# Altium PCB S7CAS-PLEIADES-CARTE-MERE_P01.PcbDoc (part 1 of 3)
Units mil, origin at the board's own origin, x right, y up, seen from the top; angles counter-clockwise.
Board outline 5000 x 5000 mil, 4 copper layers (Top, Ground Plane, Power Plane, Bottom), stack 67.086 mil thick; 430 components, 327 nets, 2174 pads, 171 vias.
Unrouted connection lines stored in the file: 1387.
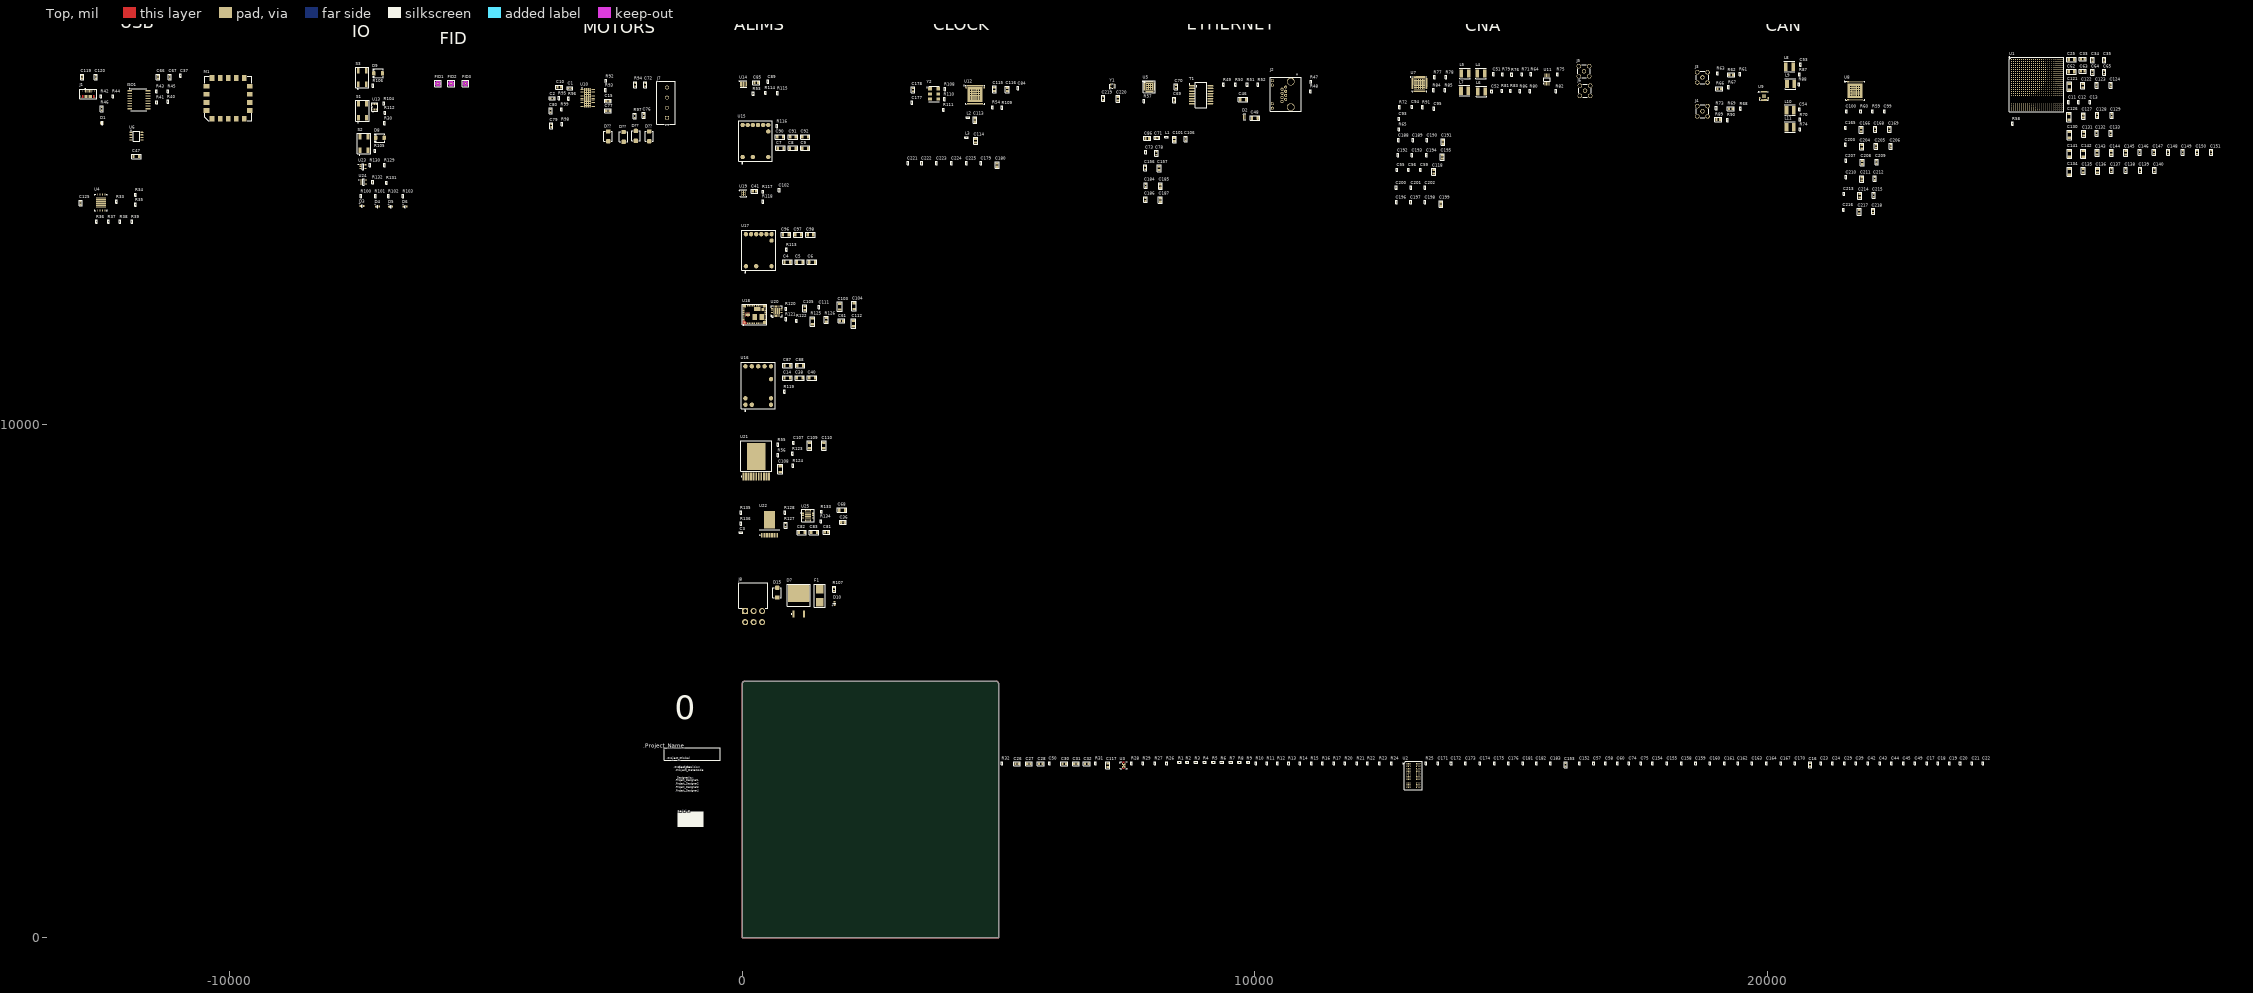
[diagram p0: Top view]
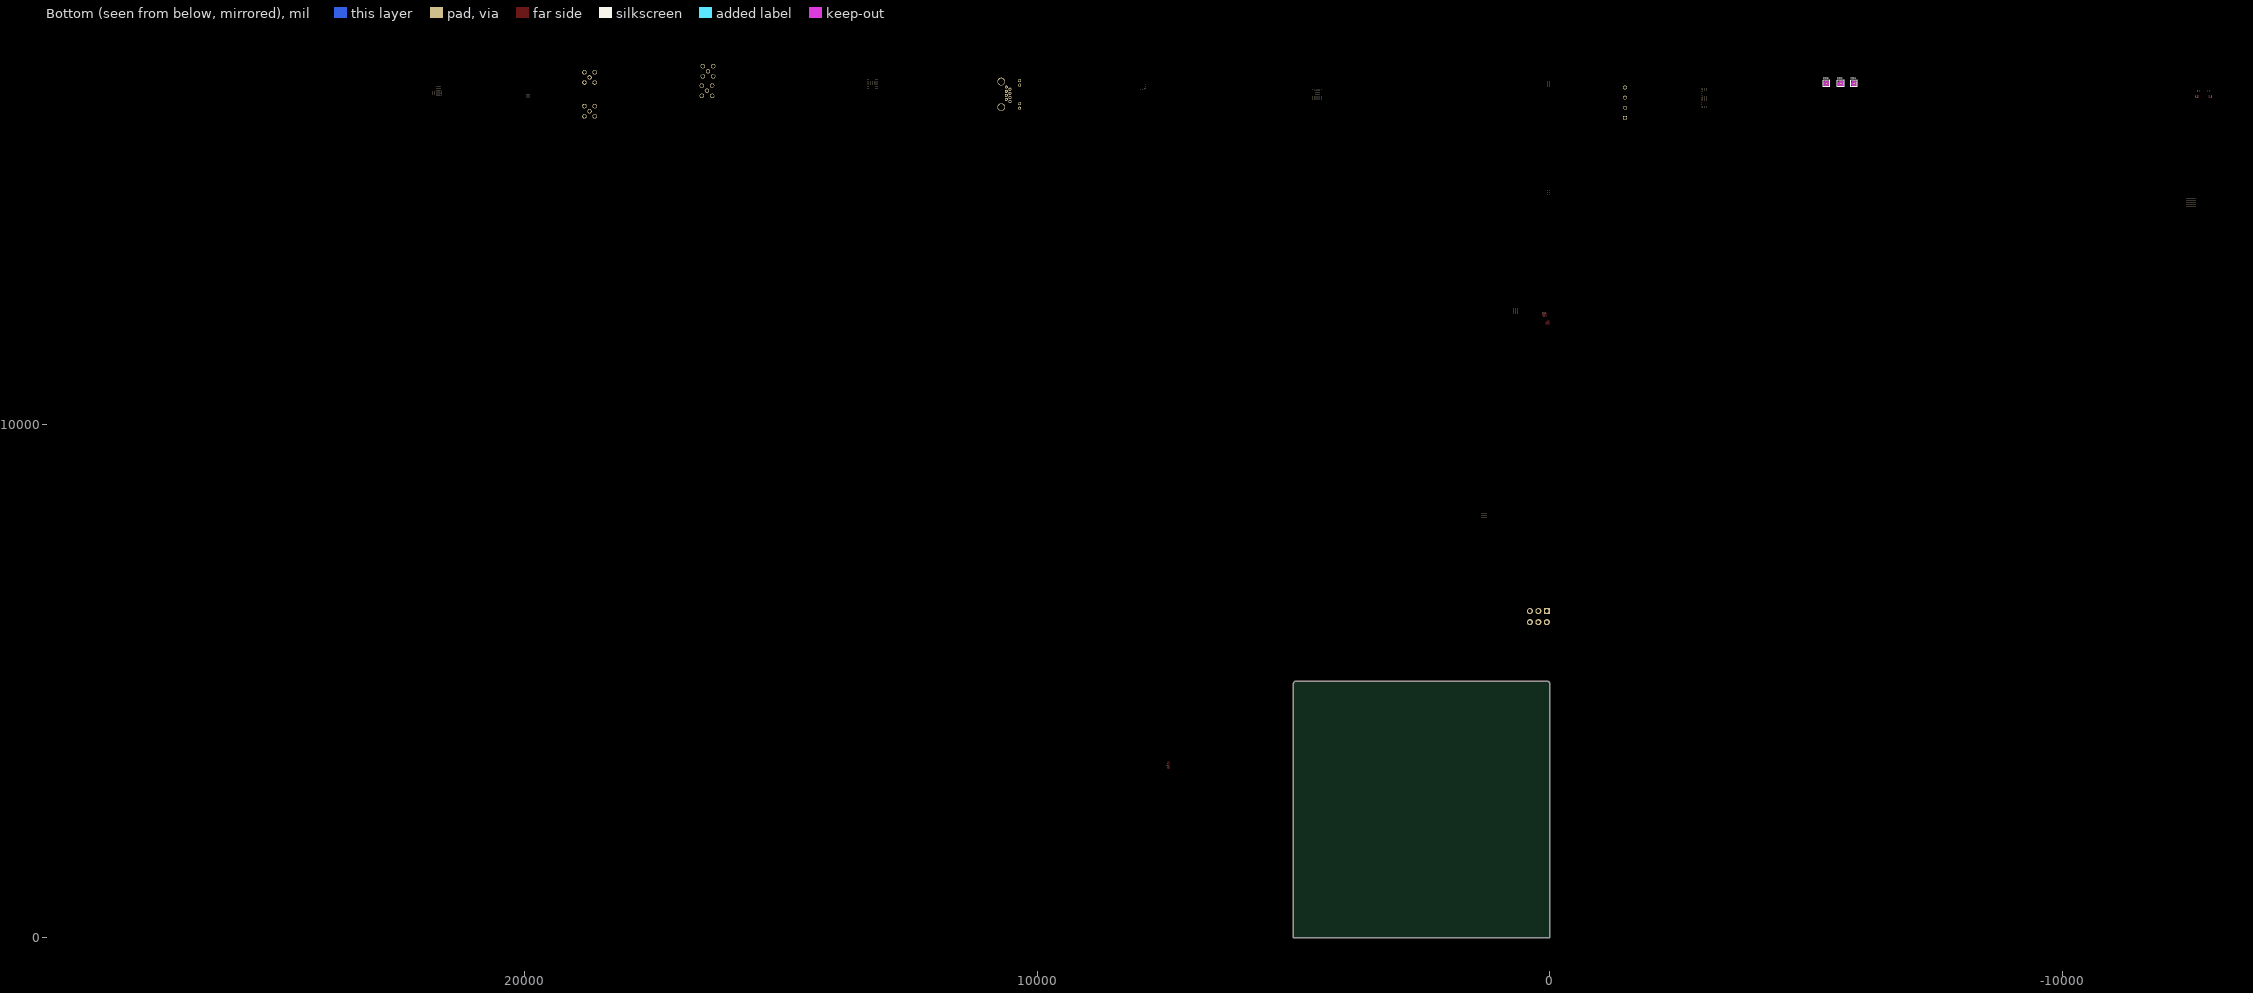
[diagram p1: Bottom view, seen from below]
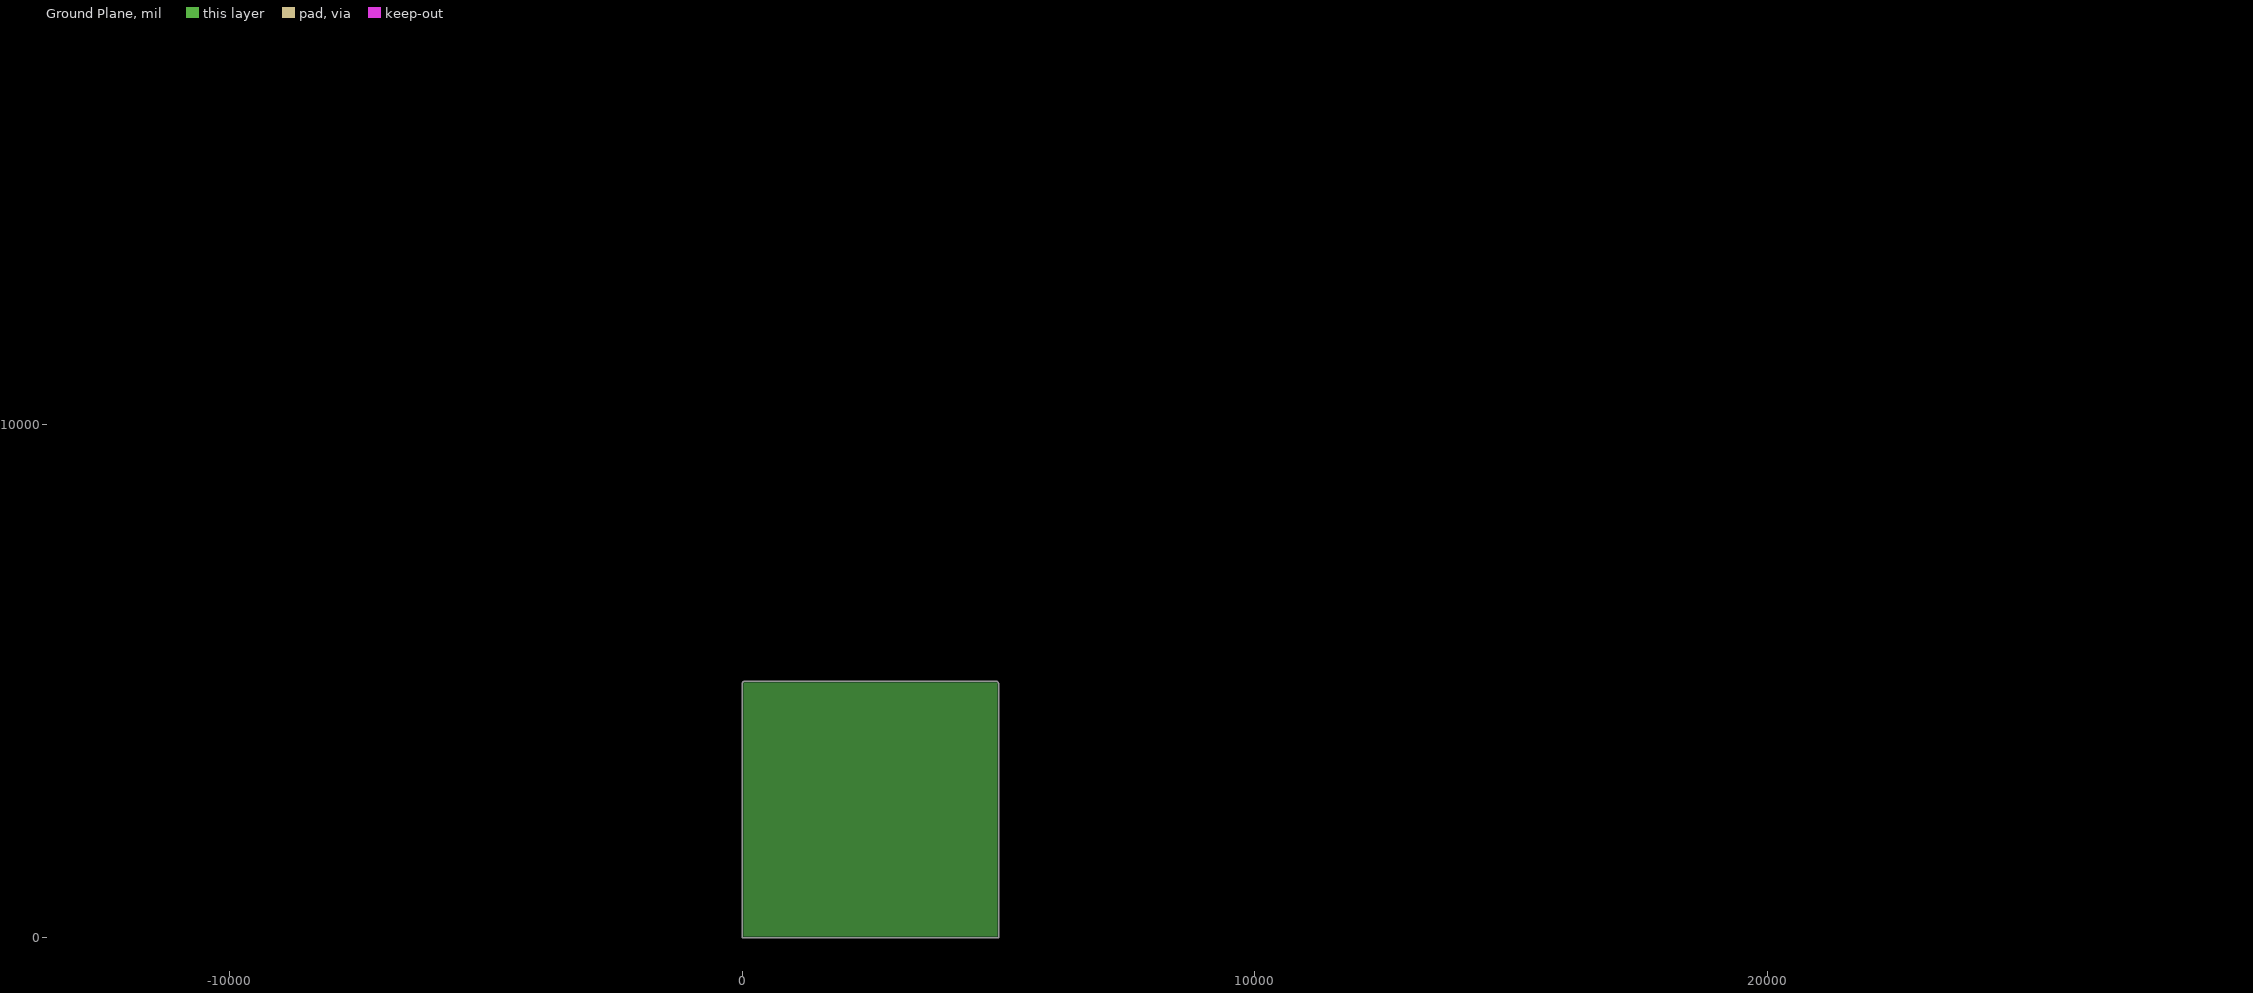
[diagram p2: Ground Plane, clearances drawn from the general rule]
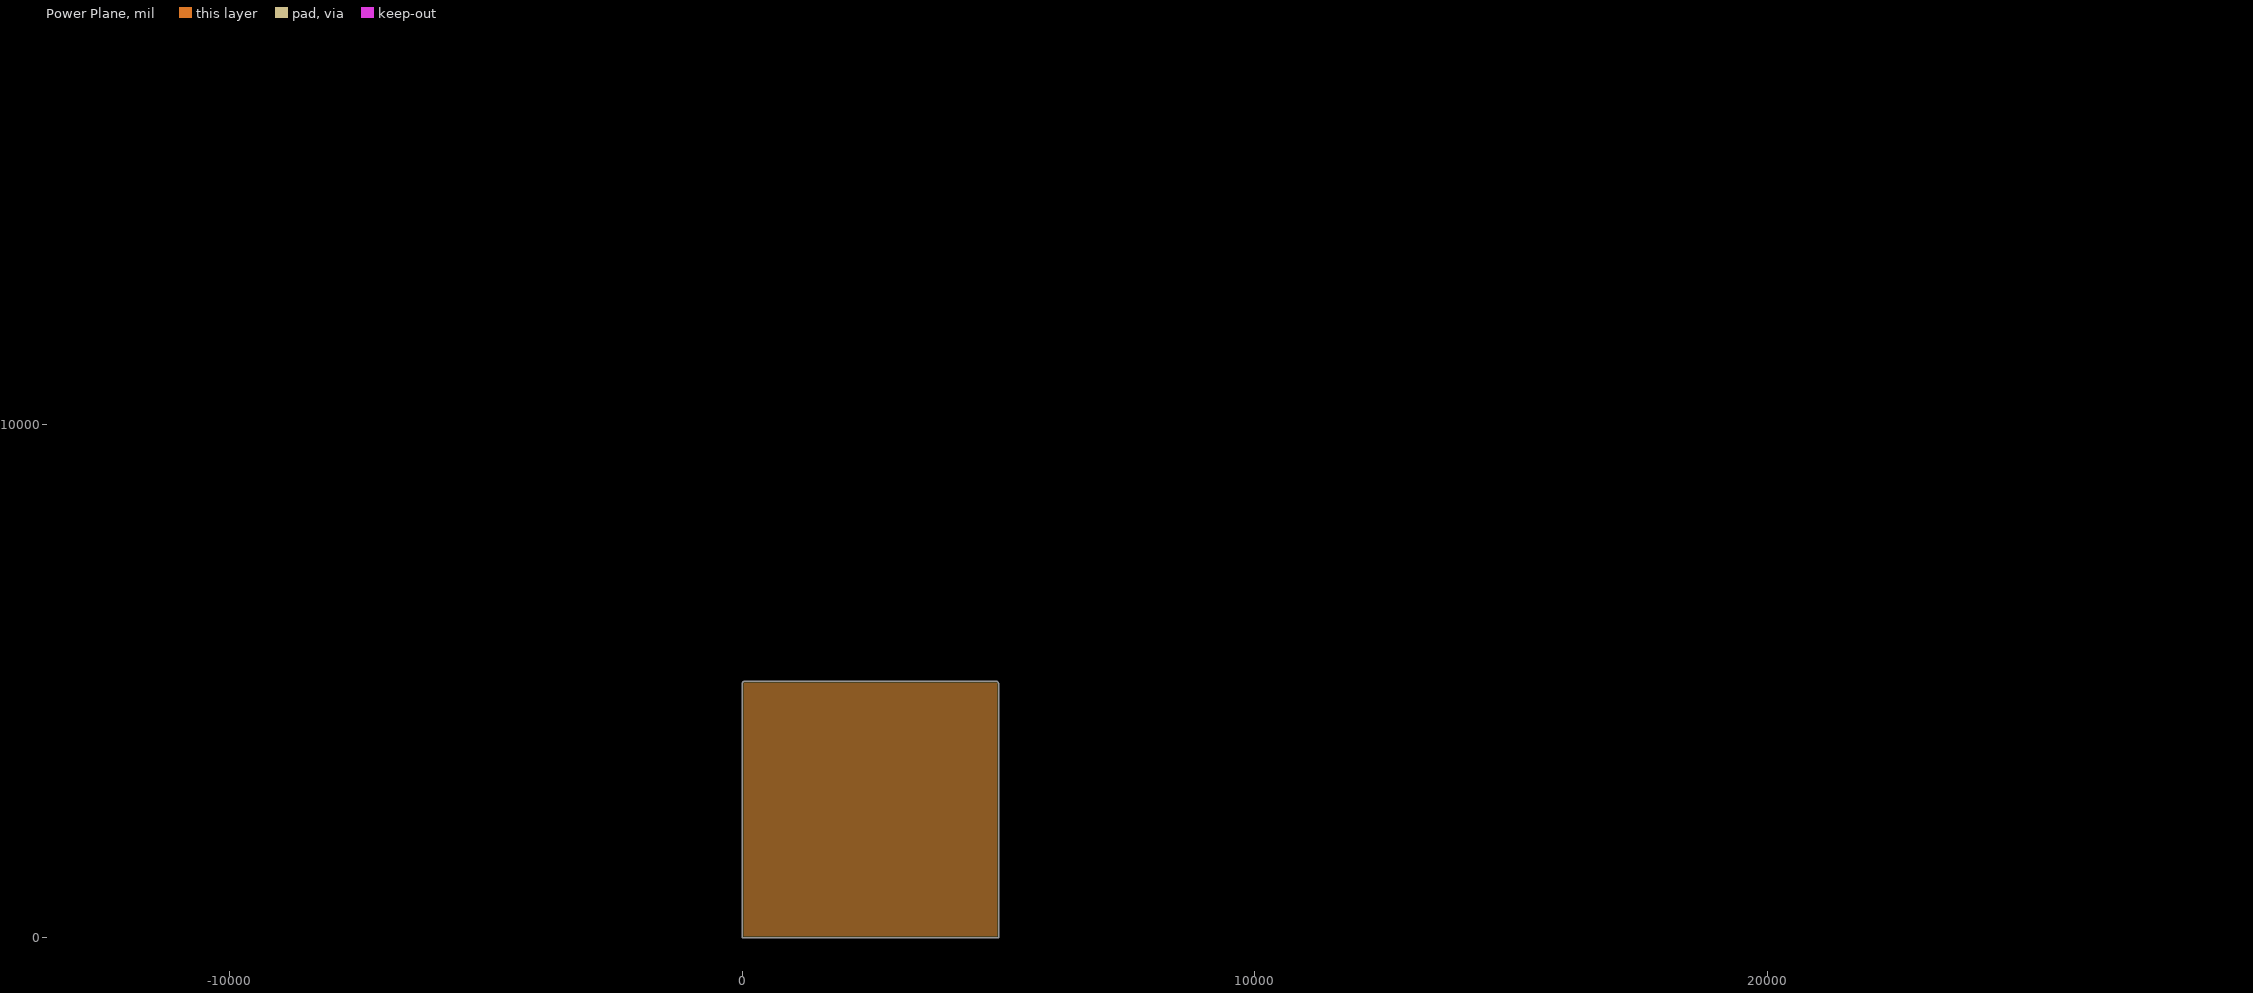
[diagram p3: Power Plane, clearances drawn from the general rule]

## Layer stack, top to bottom
Top Solder: solder mask 0.4, Solder Resist, Dk 3.5
Top: signal copper 1.378
Dielectric 1: prepreg 7.874, FR-4, Dk 4.2
Ground Plane: plane copper 0.669
Dielectric 3: core 47.244, Dk 4.2
Power Plane: plane copper 0.669
Dielectric 4: prepreg 7.874, Dk 4.2
Bottom: signal copper 1.378
Bottom Solder: solder mask 0.4, Solder Resist, Dk 3.5

## Board outline
0,0 5000,0 5000,4950 ccw(c4950,4950) 4950,5000 50,5000 ccw(c50,4950) 0,4950

## Design rules (kind name [scope] priority, off if disabled: settings)
Clearance [All] p1: gap=6 ignorepadtopadclearanceinfootprint=FALSE except(0: Arc-Hole Track-Hole SMDPad-Hole THPad-Hole Via-Hole Fill-Hole Poly-Hole Region-Hole Text-Hole)
ComponentClearance [All] p1: gap=4 collisioncheckmode=3 verticalgap=4 showdistances=FALSE
DiffPairsRouting [InDifferentialPairClass('All Differential Pairs')] p1: maxlimit=5 minlimit=5 mostfreqgap=5 toplayer_minwidth=45.03 toplayer_maxwidth=45.03 toplayer_prefwidth=12.87 bottomlayer_minwidth=45.03 bottomlayer_maxwidth=45.03 bottomlayer_prefwidth=12.87 impedanceprofiledriven=TRUE impedanceprofileid={94CB91C9-4EF6-439D-B189-707E4422B6E0} impedanceprofilevalue=80.000000 maxuncoupledlength=500
HoleSize [All] p1: absolutevalues=TRUE maxlimit=1000 minlimit=4 maxpercent=80.000 minpercent=20.000
HoleToHoleClearance [All] p1: gap=10 allowstackedmicrovias=FALSE
MinimumSolderMaskSliver [All] p1: minsoldermaskwidth=4
PlaneClearance [All] p1: clearance=6
PlaneConnect [All] p1: pad.planeconnectstyle=Relief pad.reliefexpansion=20 pad.reliefentries=4 pad.reliefconductorwidth=10 pad.reliefairgap=10 via.planeconnectstyle=Direct via.reliefexpansion=20 via.reliefentries=4 via.reliefconductorwidth=10 via.reliefairgap=10
PolygonConnect [All] p1: thpad.connectstyle=Relief thpad.reliefconductorwidth=10 thpad.reliefentries=4 thpad.polygonreliefangle="90 Angle" thpad.airgapwidth=10 smdpad.connectstyle=Direct smdpad.reliefconductorwidth=10 smdpad.reliefentries=4 smdpad.polygonreliefangle="90 Angle" smdpad.airgapwidth=10 via.connectstyle=Direct via.reliefconductorwidth=10 via.reliefentries=4 via.polygonreliefangle="90 Angle" via.airgapwidth=10
RoutingVias [All] p1: holewidth=10 width=20 viastyle="Through Hole" minholewidth=10 minwidth=20 maxholewidth=10 maxwidth=20
SilkToSilkClearance [All] p1: silktosilkclearance=4
SilkToSolderMaskClearance [IsPad] p1: minsilkscreentomaskgap=2 clearancetoexposedcopper=FALSE
SolderMaskExpansion [All] p1: expansion=2 istentingtop=FALSE
SupplyNets "Schematic Supply Nets_14" [InNet('ANA_3V3')] p1: voltage=0.000
SupplyNets "Schematic Supply Nets_13" [InNet('5V_AMP')] p2: voltage=0.000
SupplyNets "Schematic Supply Nets_12" [InNet('6V')] p3: voltage=0.000
SupplyNets "Schematic Supply Nets_11" [InNet('1V2')] p4: voltage=0.000
SupplyNets "Schematic Supply Nets_10" [InNet('M1')] p5: voltage=0.000
SupplyNets "Schematic Supply Nets_9" [InNet('CLK_1V8')] p6: voltage=0.000
SupplyNets "Schematic Supply Nets_8" [InNet('GND_USB')] p7: voltage=0.000
SupplyNets "Schematic Supply Nets_7" [InNet('-5V_AMP')] p8: voltage=0.000
SupplyNets "Schematic Supply Nets_6" [InNet('5V')] p9: voltage=0.000
SupplyNets "Schematic Supply Nets_5" [InNet('VREF0V75')] p10: voltage=0.000
SupplyNets "Schematic Supply Nets_4" [InNet('+24V')] p11: voltage=0.000
SupplyNets "Schematic Supply Nets_3" [InNet('-8V')] p12: voltage=0.000
SupplyNets "Schematic Supply Nets_2" [InNet('VCC1V5')] p13: voltage=0.000
SupplyNets "Schematic Supply Nets_1" [InNet('M0')] p14: voltage=0.000
SupplyNets "Schematic Supply Nets" [InNet('VTT0V75')] p15: voltage=0.000
Width [All] p1: maxlimit=1000 minlimit=4 preferedwidth=6
21 further rules are at their usual default settings.

## Classes and differential pairs
net class USB: DD_N DD_P UD_N UD_P
net class TRANS_50R: CLK_SPI_CLK CLK_SPI_LE CLK_SPI_MISO CLK_SPI_MOSI ETH_RXC ETH_RXD0 ETH_RXD1 ETH_RXD2 ETH_RXD3 ETH_TXC ETH_TXD0 ETH_TXD1 ETH_TXD2 ETH_TXD3
net class FPGA_100R: FPGA_CLK_N FPGA_CLK_P
net class ETH_100R: RX_ETH_N RX_ETH_P RX_ISO_N RX_ISO_P TX_ETH_N TX_ETH_P TX_ISO_N TX_ISO_P
net class DDR3_80R: DDR3_CK_N DDR3_CK_P DDR3_LDQS_N DDR3_LDQS_P DDR3_UDQS_N DDR3_UDQS_P
net class DDR3_40R: DDR3_A0 DDR3_A1 DDR3_A2 DDR3_A3 DDR3_A4 DDR3_A5 DDR3_A6 DDR3_A7 DDR3_A8 DDR3_A9 DDR3_A10 DDR3_A11 DDR3_A12 DDR3_A13 DDR3_BA0 DDR3_BA1 DDR3_BA2 DDR3_CAS DDR3_CKE DDR3_CS DDR3_DQ0 DDR3_DQ1 DDR3_DQ2 DDR3_DQ3 DDR3_DQ4 DDR3_DQ5 DDR3_DQ6 DDR3_DQ7 DDR3_DQ8 DDR3_DQ9 DDR3_DQ10 DDR3_DQ11 DDR3_DQ12 DDR3_DQ13 DDR3_DQ14 DDR3_DQ15 DDR3_LDM DDR3_ODT DDR3_RAS DDR3_UDM DDR3_WE
net class CNA_100R: CNA_CLK_N CNA_CLK_P CNA_D0_N CNA_D0_P CNA_D1_N CNA_D1_P CNA_D2_N CNA_D2_P CNA_D3_N CNA_D3_P CNA_D4_N CNA_D4_P CNA_D5_N CNA_D5_P CNA_D6_N CNA_D6_P CNA_D7_N CNA_D7_P CNA_DCI_N CNA_DCI_P CNA_FRAME_N CNA_FRAME_P
net class CAN_100R: CAN_CLK_N CAN_CLK_P CAN_CLKOUT_N CAN_CLKOUT_P CAN_DA0_N CAN_DA0_P CAN_DA2_N CAN_DA2_P CAN_DA4_N CAN_DA4_P CAN_DA6_N CAN_DA6_P CAN_DA8_N CAN_DA8_P CAN_DA10_N CAN_DA10_P CAN_DA12_N CAN_DA12_P CAN_DB0_N CAN_DB0_P CAN_DB2_N CAN_DB2_P CAN_DB4_N CAN_DB4_P CAN_DB6_N CAN_DB6_P CAN_DB8_N CAN_DB8_P CAN_DB10_N CAN_DB10_P CAN_DB12_N CAN_DB12_P CAN_IN1_N CAN_IN1_P CAN_IN2_N CAN_IN2_P
component class S7CAS-PLEIADES-CARTE-MERE_P01_TITLE: FID1 FID2 FID3
component class S7CAS-PLEIADES-CARTE-MERE_P01_MOTORS: C1 C2 C10 C15 C72 C76 C77 C79 C80 D?? J7 R92 R93 R94 R95 R96 R97 R98 R99 U10
component class S7CAS-PLEIADES-CARTE-MERE_P01_IO: D3 D4 D5 D6 D8 D9 R30 R100 R101 R102 R103 R104 R105 R106 R112 R129 R130 R131 R132 S1 S2 S3 U13 U23 U24
component class S7CAS-PLEIADES-CARTE-MERE_P01_FPGA-BANK4: C130 C131 C132 C133
component class S7CAS-PLEIADES-CARTE-MERE_P01_FPGA-BANK3: C11 C12 C13 C126 C127 C128 C129
component class S7CAS-PLEIADES-CARTE-MERE_P01_FPGA-BANK2: C37 C47 C66 C67 C119 C120 C121 C122 C123 C124 C125 D1 ISO1 J1 M1 R33 R34 R35 R36 R37 R38 R39 R40 R41 R42 R43 R44 R45 R46 R58 U4 U6
component class S7CAS-PLEIADES-CARTE-MERE_P01_FPGA-BANK1: C62 C63 C64 C65
component class S7CAS-PLEIADES-CARTE-MERE_P01_FPGA-BANK0: C25 C33 C34 C35 U1
component class S7CAS-PLEIADES-CARTE-MERE_P01_FPGA-ALIM: C134 C135 C136 C137 C138 C139 C140 C141 C142 C143 C144 C145 C146 C147 C148 C149 C150 C151
component class S7CAS-PLEIADES-CARTE-MERE_P01_ETHERNET: C46 C48 C69 C70 C71 C73 C78 C86 C101 C106 C156 C157 C184 C185 C186 C187 C219 C220 D2 J2 L1 R47 R48 R49 R50 R51 R52 R57 T1 U5 Y1
component class S7CAS-PLEIADES-CARTE-MERE_P01_DDR3: C16 C17 C18 C19 C20 C21 C22 C23 C24 C26 C27 C28 C29 C30 C31 C32 C39 C42 C43 C44 C45 C49 C50 C57 C58 C60 C74 C75 C117 C152 C153 C154 C155 C158 C159 C160 C161 C162 C163 C164 C167 C170 C171 C172 C173 C174 C175 C176 C181 C182 C183 R1 R2 R3 R4 R5 R6 R7 R8 R9 R10 R11 R12 R13 R14 R15 R16 R17 R20 R21 R22 R23 R24 R25 R26 R27 R28 R29 R31 R32 U2 U3
component class S7CAS-PLEIADES-CARTE-MERE_P01_CNA: C51 C52 C55 C56 C59 C93 C94 C95 C118 C188 C189 C190 C191 C192 C193 C194 C195 C196 C197 C198 C199 C200 C201 C202 J5 J6 L4 L5 L6 L7 R64 R65 R71 R72 R75 R76 R77 R78 R79 R80 R81 R82 R83 R84 R85 R86 R91 U7 U11
component class S7CAS-PLEIADES-CARTE-MERE_P01_CLOCK: C84 C113 C114 C115 C116 C177 C178 C179 C180 C221 C222 C223 C224 C225 L2 L3 R54 R108 R109 R110 R111 U12 Y2
component class S7CAS-PLEIADES-CARTE-MERE_P01_CAN: C53 C54 C99 C100 C165 C166 C168 C169 C203 C204 C205 C206 C207 C208 C209 C210 C211 C212 C213 C214 C215 C216 C217 C218 J3 J4 L8 L9 L10 L11 R59 R60 R61 R62 R63 R66 R67 R68 R69 R70 R73 R74 R87 R88 R89 R90 U8 U9
component class S7CAS-PLEIADES-CARTE-MERE_P01_ALIM: C3 C4 C5 C6 C7 C8 C9 C14 C36 C38 C40 C41 C61 C68 C81 C82 C83 C85 C87 C88 C89 C90 C91 C92 C96 C97 C98 C102 C103 C104 C105 C107 C108 C109 C110 C111 C112 D7 D10 D15 F1 J8 R53 R55 R56 R107 R113 R114 R115 R116 R117 R118 R119 R120 R121 R122 R123 R124 R125 R126 R127 R128 R133 R134 R135 R136 U14 U15 U16 U17 U18 U19 U20 U21 U22 U25
differential pair UD: +UD_P -UD_N
differential pair TX_ISO: +TX_ISO_P -TX_ISO_N
differential pair TX_ETH: +TX_ETH_P -TX_ETH_N
differential pair RX_ISO: +RX_ISO_P -RX_ISO_N
differential pair RX_ETH: +RX_ETH_P -RX_ETH_N
differential pair FPGA_CLK: +FPGA_CLK_P -FPGA_CLK_N
differential pair DD: +DD_P -DD_N
differential pair DDR3_UDQS: +DDR3_UDQS_P -DDR3_UDQS_N
differential pair DDR3_LDQS: +DDR3_LDQS_P -DDR3_LDQS_N
differential pair DDR3_CK: +DDR3_CK_P -DDR3_CK_N
differential pair CNA_FRAME: +CNA_FRAME_P -CNA_FRAME_N
differential pair CNA_DCI: +CNA_DCI_P -CNA_DCI_N
differential pair CNA_D7: +CNA_D7_P -CNA_D7_N
differential pair CNA_D6: +CNA_D6_P -CNA_D6_N
differential pair CNA_D5: +CNA_D5_P -CNA_D5_N
differential pair CNA_D4: +CNA_D4_P -CNA_D4_N
differential pair CNA_D3: +CNA_D3_P -CNA_D3_N
differential pair CNA_D2: +CNA_D2_P -CNA_D2_N
differential pair CNA_D1: +CNA_D1_P -CNA_D1_N
differential pair CNA_D0: +CNA_D0_P -CNA_D0_N
differential pair CNA_CLK: +CNA_CLK_P -CNA_CLK_N
differential pair CAN_IN2: +CAN_IN2_P -CAN_IN2_N
differential pair CAN_IN1: +CAN_IN1_P -CAN_IN1_N
differential pair CAN_DB12: +CAN_DB12_P -CAN_DB12_N
differential pair CAN_DB10: +CAN_DB10_P -CAN_DB10_N
differential pair CAN_DB8: +CAN_DB8_P -CAN_DB8_N
differential pair CAN_DB6: +CAN_DB6_P -CAN_DB6_N
differential pair CAN_DB4: +CAN_DB4_P -CAN_DB4_N
differential pair CAN_DB2: +CAN_DB2_P -CAN_DB2_N
differential pair CAN_DB0: +CAN_DB0_P -CAN_DB0_N
differential pair CAN_DA12: +CAN_DA12_P -CAN_DA12_N
differential pair CAN_DA10: +CAN_DA10_P -CAN_DA10_N
differential pair CAN_DA8: +CAN_DA8_P -CAN_DA8_N
differential pair CAN_DA6: +CAN_DA6_P -CAN_DA6_N
differential pair CAN_DA4: +CAN_DA4_P -CAN_DA4_N
differential pair CAN_DA2: +CAN_DA2_P -CAN_DA2_N
differential pair CAN_DA0: +CAN_DA0_P -CAN_DA0_N
differential pair CAN_CLK: +CAN_CLK_P -CAN_CLK_N
differential pair CAN_CLKOUT: +CAN_CLKOUT_P -CAN_CLKOUT_N

## Components (designator, comment, footprint, x,y, rotation, side; value= is the part's Value field where it differs from the comment)
C1 "CAP - 0603" CAP_0603 -3360,16569.11 r0 top value=0.1uF
C2 "CAP - 0603" CAP_0603 -3710,16370 r0 top value=0.1uF
C3 "CAP - 0402" CAP_0402 -27.5,7900 r0 top value=470pF
C4 "CAP - 1206" CAP_1206 880,13180 r0 top value=100uF
C5 "CAP - 1206" CAP_1206 1120,13180 r0 top value=100uF
C6 "CAP - 1206" CAP_1206 1360,13180 r0 top value=100uF
C7 "CAP - 1206" CAP_1206 745.98,15400 r0 top value=100uF
C8 "CAP - 1206" CAP_1206 985.98,15400 r0 top value=100uF
C9 "CAP - 1206" CAP_1206 1225.98,15400 r0 top value=100uF
C10 "CAP - 0805" CAP_0805 -3570,16590 r0 top value=0.22uF
C11 "CAP - 0402" CAP_0402 25870,16300 r90 top value=0.01uF
C12 "CAP - 0402" CAP_0402 26070,16300 r90 top value=0.01uF
C13 "CAP - 0402" CAP_0402 26290,16300 r90 top value=0.01uF
C14 "CAP - 1206" CAP_1206 880,10920 r0 top value=100uF
C15 "CAP - 0805" CAP_0805 -2619.5,16320.08 r0 top value=0.22uF
C16 "CAP - 0603" CAP_0603 20830,3370 r90 top value=1uF
C17 "CAP - 0402" CAP_0402 23110,3400 r90 top value=0.1uF
C18 "CAP - 0402" CAP_0402 23330,3400 r90 top value=0.1uF
C19 "CAP - 0402" CAP_0402 23550,3400 r90 top value=0.1uF
C20 "CAP - 0402" CAP_0402 23760,3400 r90 top value=0.1uF
C21 "CAP - 0402" CAP_0402 23990,3400 r90 top value=0.1uF
C22 "CAP - 0402" CAP_0402 24200,3400 r90 top value=0.1uF
C23 "CAP - 0402" CAP_0402 21040,3400 r90 top value=0.1uF
C24 "CAP - 0402" CAP_0402 21270,3400 r90 top value=0.1uF
C25 "CAP - 1206" CAP_1206 25930,17130 r0 top value=100uF
C26 "CAP - 0805" CAP_0805 5360,3390 r0 top value=1000pF
C27 "CAP - 0805" CAP_0805 5590,3390 r0 top value=10uF
C28 "CAP - 0805" CAP_0805 5820,3390 r0 top value=10uF
C29 "CAP - 0402" CAP_0402 21500,3400 r90 top value=0.1uF
C30 "CAP - 0805" CAP_0805 6280,3390 r0 top value=10uF
C31 "CAP - 0805" CAP_0805 6510,3390 r0 top value=10uF
C32 "CAP - 0805" CAP_0805 6720,3390 r0 top value=10uF
C33 "CAP - 0805" CAP_0805 26150,17140 r0 top value=4.7uF
C34 "CAP - 0603" CAP_0603 26340,17120 r90 top value=470nF
C35 "CAP - 0603" CAP_0603 26570,17120 r90 top value=470nF
C36 "CAP - 0805" CAP_0805 1963.5,8100 r0 top value=10uF
C37 "CAP - 0402" CAP_0402 -10960,16820 r90 top value=200pF
C38 "CAP - 1206" CAP_1206 1120,10920 r0 top value=100uF
C39 "CAP - 0402" CAP_0402 21730,3400 r90 top value=0.1uF
C40 "CAP - 1206" CAP_1206 1360,10920 r0 top value=100uF
C41 "CAP - 0805" CAP_0805 236.5,14559.37 r0 top value=22uF
C42 "CAP - 0402" CAP_0402 21960,3400 r90 top value=0.1uF
C43 "CAP - 0402" CAP_0402 22190,3400 r90 top value=0.1uF
C44 "CAP - 0402" CAP_0402 22420,3400 r90 top value=0.1uF
C45 "CAP - 0402" CAP_0402 22650,3400 r90 top value=0.1uF
C46 "CAP - 1206" CAP_1206 9770,16350 r0 top value=1000pF
C47 "CAP - 1206" CAP_1206 -11820,15240 r0 top value=1000pF
C48 "CAP - 1206" CAP_1206 10000,15990 r0 top value=1000pF
C49 "CAP - 0402" CAP_0402 22880,3400 r90 top value=0.1uF
C50 "CAP - 0402" CAP_0402 5990,3400 r90 top value=0.1uF
C51 "CAP - 0402" CAP_0402 14650,16850 r90 top value=100pF
C52 "CAP - 0402" CAP_0402 14620,16510 r90 top value=100pF
C53 "CAP - 0402" CAP_0402 20640,17030 r90 top value=100pF
C54 "CAP - 0402" CAP_0402 20625,16160 r90 top value=100pF
C55 "CAP - 0402" CAP_0402 12770,14980 r90 top value=470pF
C56 "CAP - 0402" CAP_0402 13000,14980 r90 top value=470pF
C57 "CAP - 0402" CAP_0402 16610,3400 r90 top value=100nF
C58 "CAP - 0402" CAP_0402 16840,3400 r90 top value=100nF
C59 "CAP - 0402" CAP_0402 13230,14980 r90 top value=68nF
C60 "CAP - 0402" CAP_0402 17070,3400 r90 top value=100nF
C61 "CAP - 0805" CAP_0805 1933.5,12030 r0 top value=10uF
C62 "CAP - 1206" CAP_1206 25930,16890 r0 top value=100uF
C63 "CAP - 0805" CAP_0805 26150,16900 r0 top value=4.7uF
C64 "CAP - 0603" CAP_0603 26340,16880 r90 top value=470nF
C65 "CAP - 0603" CAP_0603 26570,16880 r90 top value=470nF
C66 "CAP - 0603" CAP_0603 -11400,16790 r90 top value=0.1uF
C67 "CAP - 0603" CAP_0603 -11170,16790 r90 top value=0.1uF
C68 "CAP - 1206" CAP_1206 1947,8340 r0 top value=47uF
C69 "CAP - 0603" CAP_0603 8430,16340 r90 top value=0.1uF
C70 "CAP - 0603" CAP_0603 8460,16600 r90 top value=0.1uF
C71 "CAP - 0603" CAP_0603 8090.5,15600 r0 top value=0.1uF
C72 "CAP - 0603" CAP_0603 -1890,16639.5 r90 top value=0.1uF
C73 "CAP - 0402" CAP_0402 7870,15327.5 r90 top value=2.2uF
C74 "CAP - 0402" CAP_0402 17300,3400 r90 top value=100nF
C75 "CAP - 0402" CAP_0402 17530,3400 r90 top value=100nF
C76 "CAP - 0603" CAP_0603 -1920,16039.5 r90 top value=0.1uF
C77 "CAP - 0805" CAP_0805 -2619.5,16130 r0 top value=0.22uF
C78 "CAP - 0603" CAP_0603 8080,15300 r90 top value=0.1uF
C79 "CAP - 0603" CAP_0603 -3730,15840 r90 top value=1000pF
C80 "CAP - 0603" CAP_0603 -3740,16130 r90 top value=1000pF
C81 "CAP - 0805" CAP_0805 1640,7910 r0 top value=4.7uF
C82 "CAP - 1206" CAP_1206 1160,7905 r0 top value=47uF
C83 "CAP - 1206" CAP_1206 1400,7905 r0 top value=47uF
C84 "CAP - 0402" CAP_0402 5380,16572.5 r90 top value=1uF
C85 "CAP - 0805" CAP_0805 273.5,16680 r0 top value=22uF
C86 "CAP - 0805" CAP_0805 7900,15590 r0 top value=22uF
C87 "CAP - 1206" CAP_1206 880,11160 r0 top value=100uF
C88 "CAP - 1206" CAP_1206 1130,11160 r0 top value=100uF
C89 "CAP - 0402" CAP_0402 500,16697.5 r90 top value=2.2uF
C90 "CAP - 1206" CAP_1206 737.94,15620 r0 top value=100uF
C91 "CAP - 1206" CAP_1206 987.94,15620 r0 top value=100uF
C92 "CAP - 1206" CAP_1206 1227.94,15620 r0 top value=100uF
C93 "CAP - 0402" CAP_0402 12810.97,15975 r90 top value=0.1uF
C94 "CAP - 0402" CAP_0402 13060,16207.5 r90 top value=0.1uF
C95 "CAP - 0402" CAP_0402 13491.33,16175 r90 top value=0.1uF
C96 "CAP - 1206" CAP_1206 850,13710 r0 top value=100uF
C97 "CAP - 1206" CAP_1206 1090,13710 r0 top value=100uF
C98 "CAP - 1206" CAP_1206 1330,13710 r0 top value=100uF
C99 "CAP - 0402" CAP_0402 22278.98,16120 r90 top value=0.1uF
C100 "CAP - 0402" CAP_0402 21538.98,16120 r90 top value=0.1uF
C101 "CAP - 0805" CAP_0805 8430,15570 r90 top value=22uF
C102 "CAP - 0402" CAP_0402 720,14584.96 r90 top value=2.2uF
C103 "CAP - 1206" CAP_1206 1900,12310 r90 top value=47uF
C104 "CAP - 1206" CAP_1206 2180,12320 r90 top value=47uF
C105 "CAP - 0805" CAP_0805 1220,12276.5 r90 top value=4.7uF
C106 "CAP - 0603" CAP_0603 8650,15580 r90 top value=0.1uF
C107 "CAP - 0402" CAP_0402 1000,9652.5 r90 top value=470pF
C108 "CAP - 1206" CAP_1206 740,9140 r90 top value=1.2uF
C109 "CAP - 1206" CAP_1206 1310,9600 r90 top value=100uF
C110 "CAP - 1206" CAP_1206 1590,9600 r90 top value=100uF
C111 "CAP - 0402" CAP_0402 1500,12299.96 r90 top value=1uF
C112 "CAP - 1206" CAP_1206 2170,11980 r90 top value=47uF
C113 "CAP - 0805" CAP_0805 4540,15950 r90 top value=10uF
C114 "CAP - 0805" CAP_0805 4550,15546.5 r90 top value=10uF
C115 "CAP - 0805" CAP_0805 4920,16550 r90 top value=10uF
C116 "CAP - 0805" CAP_0805 5170,16546.5 r90 top value=10uF
C117 "CAP - 0805" CAP_0805 7130,3360 r90 top value=4.7uF
C118 "CAP - 0805" CAP_0805 13490,14940 r90 top value=4.7uF
C119 "CAP - 0603" CAP_0603 -12880,16790 r90 top value=0.1uF
C120 "CAP - 0603" CAP_0603 -12610,16790 r90 top value=0.1uF
C121 "CAP - 1206" CAP_1206 25890,16600 r90 top value=100uF
C122 "CAP - 0805" CAP_0805 26150,16620 r90 top value=4.7uF
C123 "CAP - 0603" CAP_0603 26420,16630 r90 top value=470nF
C124 "CAP - 0603" CAP_0603 26700,16630 r90 top value=470nF
C125 "CAP - 0603" CAP_0603 -12910,14330.5 r90 top value=0.1uF
C126 "CAP - 1206" CAP_1206 25885,16010 r90 top value=100uF
C127 "CAP - 0805" CAP_0805 26165,16030 r90 top value=4.7uF
C128 "CAP - 0603" CAP_0603 26435,16040 r90 top value=470nF
C129 "CAP - 0603" CAP_0603 26715,16040 r90 top value=470nF
C130 "CAP - 1206" CAP_1206 25890,15660 r90 top value=100uF
C131 "CAP - 0805" CAP_0805 26170,15680 r90 top value=4.7uF
C132 "CAP - 0603" CAP_0603 26420,15690 r90 top value=470nF
C133 "CAP - 0603" CAP_0603 26700,15690 r90 top value=470nF
C134 "CAP - 1206" CAP_1206 25890,14940 r90 top value=100uF
C135 "CAP - 0805" CAP_0805 26160,14960 r90 top value=4.7uF
C136 "CAP - 0805" CAP_0805 26440,14960 r90 top value=4.7uF
C137 "CAP - 0603" CAP_0603 26710,14970 r90 top value=470nF
C138 "CAP - 0603" CAP_0603 26990,14970 r90 top value=470nF
C139 "CAP - 0603" CAP_0603 27270,14970 r90 top value=470nF
C140 "CAP - 0603" CAP_0603 27550,14970 r90 top value=470nF
C141 "CAP - 1206" CAP_1206 25890,15290 r90 top value=100uF
C142 "CAP - 1206" CAP_1206 26160,15290 r90 top value=100uF
C143 "CAP - 0805" CAP_0805 26430,15310 r90 top value=4.7uF
C144 "CAP - 0805" CAP_0805 26710,15310 r90 top value=4.7uF
C145 "CAP - 0805" CAP_0805 26990,15310 r90 top value=4.7uF
C146 "CAP - 0603" CAP_0603 27260,15320 r90 top value=470nF
C147 "CAP - 0603" CAP_0603 27540,15320 r90 top value=470nF
C148 "CAP - 0603" CAP_0603 27820,15320 r90 top value=470nF
C149 "CAP - 0603" CAP_0603 28100,15320 r90 top value=470nF
C150 "CAP - 0603" CAP_0603 28380,15320 r90 top value=470nF
C151 "CAP - 0603" CAP_0603 28660,15320 r90 top value=470nF
C152 "CAP - 0402" CAP_0402 16330,3400 r90 top value=100nF
C153 "CAP - 0603" CAP_0603 16060,3370 r90 top value=1uF
C154 "CAP - 0402" CAP_0402 17760,3400 r90 top value=100nF
C155 "CAP - 0402" CAP_0402 18040,3400 r90 top value=100nF
C156 "CAP - 0603" CAP_0603 7862,15020 r90 top value=0.1uF
C157 "CAP - 0805" CAP_0805 8130,15010 r90 top value=22uF
C158 "CAP - 0402" CAP_0402 18320,3400 r90 top value=100nF
C159 "CAP - 0402" CAP_0402 18600,3400 r90 top value=100nF
C160 "CAP - 0402" CAP_0402 18880,3400 r90 top value=100nF
C161 "CAP - 0402" CAP_0402 19160,3400 r90 top value=100nF
C162 "CAP - 0402" CAP_0402 19420,3400 r90 top value=100nF
C163 "CAP - 0402" CAP_0402 19700,3400 r90 top value=100nF
C164 "CAP - 0402" CAP_0402 19980,3400 r90 top value=100nF
C165 "CAP - 0402" CAP_0402 21520,15800 r90 top value=100nF
C166 "CAP - 0805" CAP_0805 21830,15760 r90 top value=2.2uF
C167 "CAP - 0402" CAP_0402 20260,3400 r90 top value=100nF
C168 "CAP - 0603" CAP_0603 22100,15770 r90 top value=2.2nF
C169 "CAP - 0603" CAP_0603 22380,15770 r90 top value=2.2nF
C170 "CAP - 0402" CAP_0402 20540,3400 r90 top value=100nF
C171 "CAP - 0402" CAP_0402 13570,3400 r90 top value=0.1uF
C172 "CAP - 0402" CAP_0402 13830,3400 r90 top value=0.1uF
C173 "CAP - 0402" CAP_0402 14110,3400 r90 top value=0.1uF
C174 "CAP - 0402" CAP_0402 14390,3400 r90 top value=0.1uF
C175 "CAP - 0402" CAP_0402 14670,3400 r90 top value=0.1uF
C176 "CAP - 0402" CAP_0402 14950,3400 r90 top value=0.1uF
C177 "CAP - 0402" CAP_0402 3310,16292.5 r90 top value=4.7nF
C178 "CAP - 0603" CAP_0603 3330,16540 r90 top value=470nF
C179 "CAP - 0402" CAP_0402 4660,15110 r90 top value=2.7nF
C180 "CAP - 0805" CAP_0805 4970,15070 r90 top value=1uF
C181 "CAP - 0402" CAP_0402 15230,3400 r90 top value=0.1uF
C182 "CAP - 0402" CAP_0402 15490,3400 r90 top value=0.1uF
C183 "CAP - 0402" CAP_0402 15770,3400 r90 top value=0.1uF
C184 "CAP - 0603" CAP_0603 7868,14670 r90 top value=0.1uF
C185 "CAP - 0805" CAP_0805 8158,14660 r90 top value=22uF
C186 "CAP - 0603" CAP_0603 7865,14400 r90 top value=0.1uF
C187 "CAP - 0805" CAP_0805 8155,14390 r90 top value=22uF
C188 "CAP - 0402" CAP_0402 12800,15560 r90 top value=470pF
C189 "CAP - 0402" CAP_0402 13080,15560 r90 top value=470pF
C190 "CAP - 0402" CAP_0402 13360,15560 r90 top value=68nF
C191 "CAP - 0805" CAP_0805 13670,15520 r90 top value=4.7uF
C192 "CAP - 0402" CAP_0402 12787,15270 r90 top value=470pF
C193 "CAP - 0402" CAP_0402 13067,15270 r90 top value=470pF
C194 "CAP - 0402" CAP_0402 13347,15270 r90 top value=68nF
C195 "CAP - 0805" CAP_0805 13657,15230 r90 top value=4.7uF
C196 "CAP - 0402" CAP_0402 12760,14350 r90 top value=470pF
C197 "CAP - 0402" CAP_0402 13040,14350 r90 top value=470pF
C198 "CAP - 0402" CAP_0402 13320,14350 r90 top value=68nF
C199 "CAP - 0805" CAP_0805 13630,14310 r90 top value=4.7uF
C200 "CAP - 0402" CAP_0402 12757,14630 r90 top value=470pF
C201 "CAP - 0402" CAP_0402 13047,14630 r90 top value=470pF
C202 "CAP - 0402" CAP_0402 13317,14630 r90 top value=68nF
C203 "CAP - 0402" CAP_0402 21517,15470 r90 top value=100nF
C204 "CAP - 0805" CAP_0805 21837,15430 r90 top value=2.2uF
C205 "CAP - 0603" CAP_0603 22117,15440 r90 top value=2.2nF
C206 "CAP - 0603" CAP_0603 22407,15440 r90 top value=2.2nF
C207 "CAP - 0402" CAP_0402 21528,15160 r90 top value=100nF
C208 "CAP - 0805" CAP_0805 21848,15120 r90 top value=2.2uF
C209 "CAP - 0603" CAP_0603 22128,15130 r90 top value=2.2nF
C210 "CAP - 0402" CAP_0402 21530,14840 r90 top value=100nF
C211 "CAP - 0805" CAP_0805 21840,14800 r90 top value=2.2uF
C212 "CAP - 0603" CAP_0603 22090,14810 r90 top value=2.2nF
C213 "CAP - 0402" CAP_0402 21490,14510 r90 top value=100nF
C214 "CAP - 0805" CAP_0805 21800,14470 r90 top value=2.2uF
C215 "CAP - 0603" CAP_0603 22070,14480 r90 top value=2.2nF
C216 "CAP - 0402" CAP_0402 21480,14200 r90 top value=100nF
C217 "CAP - 0805" CAP_0805 21790,14160 r90 top value=2.2uF
C218 "CAP - 0603" CAP_0603 22060,14170 r90 top value=2.2nF
C219 "CAP - 0603" CAP_0603 7039.5,16372.13 r90 top value=0.1uF
C220 "CAP - 0805" CAP_0805 7329.5,16362.13 r90 top value=22uF
C221 "CAP - 0402" CAP_0402 3230,15110 r90 top value=2.7nF
C222 "CAP - 0402" CAP_0402 3500,15110 r90 top value=2.7nF
C223 "CAP - 0402" CAP_0402 3790,15110 r90 top value=2.7nF
C224 "CAP - 0402" CAP_0402 4080,15110 r90 top value=2.7nF
C225 "CAP - 0402" CAP_0402 4370,15110 r90 top value=2.7nF
D1 "TPD2E001DRLR" TVS_USB_TPD2E001DRLR -12491.43,15890 r0 top value="11V Breakdown"
D2 "TPD4E05U06" TVS_DATA_TPD4E05U06 9794.84,16010.31 r0 top value="4 unidirectionnal channels"
D3 "SML-311DTT86" LED_0603 -7420,14270 r0 top value=ORANGE
D4 "SML-311DTT86" LED_0603 -7117.52,14260 r0 top value=ORANGE
D5 "SML-311DTT86" LED_0603 -6860,14260 r0 top value=ORANGE
D6 "SML-311DTT86" LED_0603 -6580,14260 r0 top value=ORANGE
D7 "MBRB4030T4G" DIO_SCHOTTKY_MBRB4030T4G 1100,6643.68 r0 top value="Vf = 550mV @ 40A"
D8 "SMLVT3V3" TVS_POW_SMLVT3V3 -7070,15600 r0 top value="Vbr = 4.1V -  Clamp = 10.3V"
D9 "SMLVT3V3" TVS_POW_SMLVT3V3 -7105,16860 r0 top value="Vbr = 4.1V -  Clamp = 10.3V"
D10 "SML-311UTT86" LED_0603 1800,6517.52 r90 top value=RED
D15 "SMBJ24CA" TVS_PWR_SMBJ36CA 680,6730 r90 top value="Vbr = 26.7V -  Clamp = 38.9V"
D?? "SMBJ24CA" TVS_PWR_SMBJ36CA -2076.03,15640 r90 top value="Vbr = 26.7V -  Clamp = 38.9V"
D?? "SMBJ24CA" TVS_PWR_SMBJ36CA -2316.03,15620 r90 top value="Vbr = 26.7V -  Clamp = 38.9V"
D?? "SMBJ24CA" TVS_PWR_SMBJ36CA -1816.03,15630 r90 top value="Vbr = 26.7V -  Clamp = 38.9V"
D?? "SMBJ24CA" TVS_PWR_SMBJ36CA -2616.03,15630 r90 top value="Vbr = 26.7V -  Clamp = 38.9V"
F1 "0154005.DR" FUS_0154XXX.DR 1510,6670 r90 top value="5A 125V AC/DC FAST"
FID1 "FID 1MM" FID_CIRCLE_1MM -5940,16660 r0 top
FID2 "FID 1MM" FID_CIRCLE_1MM -5680,16660 r0 top
FID3 "FID 1MM" FID_CIRCLE_1MM -5400,16660 r0 top
ISO1 "ADUM3160BRWZ-RL" ISO_ADUM3160BRWZ-RL -11771.75,16345 r0 top value="2500Vrms voltage isolation"
J1 "10118194-0001LF" CON_USB_10118194-0001LF -12760.63,16410 r0 top value="USB - Micro B"
J2 "RJHSE-5385" CONN_ETHERNET_RJHSE-5385 10600,16450 r90 top
J3 "5-1814832-1" CONN_SMA_5-1814832-1 18730,16780 r0 top
J4 "5-1814832-1" CONN_SMA_5-1814832-1 18730,16120 r0 top
J5 "5-1814832-1" CONN_SMA_5-1814832-1 16420,16900 r0 top
J6 "5-1814832-1" CONN_SMA_5-1814832-1 16440,16520 r0 top
J7 "OSTTC040162" CONN_TERMINAL_OSTTA040161 -1470,16288.43 r90 top
J8 "0039300060" CON_MINIFIT_0039300060 220,6550 r0 top
L1 "FER - 0402" FER_0402 8272.5,15620 r0 top value=1k
L2 "FER - 0402" FER_0402 4402.5,16000 r0 top value=1k
L3 "FER - 0402" FER_0402 4372.5,15610 r0 top value=1k
L4 "LQH5BPN1R2NT0L" FP-LQH5BPB_T0-MFG 14410,16855 r0 top
L5 "LQH5BPN1R2NT0L" FP-LQH5BPB_T0-MFG 14097.47,16855 r0 top
L6 "LQH5BPN1R2NT0L" FP-LQH5BPB_T0-MFG 14420,16505 r0 top
L7 "LQH5BPN1R2NT0L" FP-LQH5BPB_T0-MFG 14090,16521.06 r0 top
L8 "LQH5BPN1R2NT0L" FP-LQH5BPB_T0-MFG 20428.15,16990 r0 top
L9 "LQH5BPN1R2NT0L" FP-LQH5BPB_T0-MFG 20450,16650 r0 top
L10 "LQH5BPN1R2NT0L" FP-LQH5BPB_T0-MFG 20440,16140 r0 top
L11 "LQH5BPN1R2NT0L" FP-LQH5BPB_T0-MFG 20440,15810 r0 top
M1 "410-357-B" MOD_JTAG_410-357-B -10030,16370 r0 top
R1 "RES - 0402" RES_0402 8530,3420 r0 top value=40.2
R2 "RES - 0402" RES_0402 8680,3420 r0 top value=40.2
R3 "RES - 0402" RES_0402 8850,3420 r0 top value=40.2
R4 "RES - 0402" RES_0402 9020,3420 r0 top value=40.2
R5 "RES - 0402" RES_0402 9190,3420 r0 top value=40.2
R6 "RES - 0402" RES_0402 9360,3420 r0 top value=40.2
R7 "RES - 0402" RES_0402 9530,3420 r0 top value=40.2
R8 "RES - 0402" RES_0402 9700,3420 r0 top value=40.2
R9 "RES - 0402" RES_0402 9870,3420 r0 top value=40.2
R10 "RES - 0402" RES_0402 10020,3400 r90 top value=40.2
R11 "RES - 0402" RES_0402 10240,3400 r90 top value=40.2
R12 "RES - 0402" RES_0402 10440,3400 r90 top value=40.2
R13 "RES - 0402" RES_0402 10660,3400 r90 top value=40.2
R14 "RES - 0402" RES_0402 10880,3400 r90 top value=40.2
R15 "RES - 0402" RES_0402 11100,3400 r90 top value=40.2
R16 "RES - 0402" RES_0402 11320,3400 r90 top value=40.2
R17 "RES - 0402" RES_0402 11540,3400 r90 top value=40.2
R20 "RES - 0402" RES_0402 11760,3400 r90 top value=40.2
R21 "RES - 0402" RES_0402 11990,3400 r90 top value=40.2
R22 "RES - 0402" RES_0402 12200,3400 r90 top value=40.2
R23 "RES - 0402" RES_0402 12430,3400 r90 top value=40.2
R24 "RES - 0402" RES_0402 12660,3400 r90 top value=40.2
R25 "RES - 0402" RES_0402 13340,3400 r90 top value=4.7k
R26 "RES - 0402" RES_0402 8280,3400 r90 top value=40.2
R27 "RES - 0402" RES_0402 8050,3400 r90 top value=40.2
R28 "RES - 0402" RES_0402 7590,3400 r90 top value=240
R29 "RES - 0402" RES_0402 7820,3400 r90 top value=100
R30 "RES - 0402" RES_0402 -6982,15890 r90 top value=10k
R31 "RES - 0402" RES_0402 6890,3400 r90 top value=10k
R32 "RES - 0402" RES_0402 5070,3400 r90 top value=10k
R33 "RES - 0402" RES_0402 -12210,14360 r90 top value=20
R34 "RES - 0402" RES_0402 -11840,14490 r90 top value=100
R35 "RES - 0402" RES_0402 -11840,14302.5 r90 top value=100
R36 "RES - 0402" RES_0402 -12599.61,13970 r90 top value=4.7k
R37 "RES - 0402" RES_0402 -12369.61,13970 r90 top value=4.7k
R38 "RES - 0402" RES_0402 -12139.61,13970 r90 top value=330
R39 "RES - 0402" RES_0402 -11909.61,13970 r90 top value=2.4k
R40 "RES - 0402" RES_0402 -11208,16310 r90 top value=4.7k
R41 "RES - 0402" RES_0402 -11424,16297.5 r90 top value=10k
R42 "RES - 0402" RES_0402 -12510,16411.97 r90 top value=24
R43 "RES - 0402" RES_0402 -11430,16510 r90 top value=24
R44 "RES - 0402" RES_0402 -12280,16411.97 r90 top value=24
R45 "RES - 0402" RES_0402 -11200,16510 r90 top value=24
R46 "RES - 0603" RES_0603 -12495,16170 r90 top value=0
R47 "RES - 0402" RES_0402 11090,16690 r90 top value=220
R48 "RES - 0402" RES_0402 11082.5,16510 r90 top value=1k
R49 "RES - 0402" RES_0402 9390,16640 r90 top value=75
R50 "RES - 0402" RES_0402 9620,16640 r90 top value=75
R51 "RES - 0402" RES_0402 9850,16640 r90 top value=75
R52 "RES - 0402" RES_0402 10060,16640 r90 top value=75
R53 "RES - 0402" RES_0402 213,16467.5 r90 top value=10k
R54 "RES - 0402" RES_0402 4882,16197.5 r90 top value=20
R55 "RES - 0402" RES_0402 700,9620 r90 top value=90.9k
R56 "RES - 0402" RES_0402 700,9412.5 r90 top value=12.1k
R57 "RES - 0402" RES_0402 7840,16320 r90 top value=10k
R58 "RES - 0402" RES_0402 24780,15882.5 r90 top value=10k
R59 "RES - 0402" RES_0402 22048.98,16120 r90 top value=49.9
R60 "RES - 0402" RES_0402 21818.98,16120 r90 top value=49.9
R61 "RES - 0402" RES_0402 19460,16850 r90 top value=1k
R62 "RES - 0805" RES_0805 19290,16830 r0 top value=500k
R63 "RES - 0402" RES_0402 19020,16862.5 r90 top value=49.9
R64 "RES - 0402" RES_0402 15387.47,16847.5 r90 top value=1k
R65 "RES - 0402" RES_0402 12810.97,15770 r90 top value=10k
R66 "RES - 0805" RES_0805 19060,16560 r0 top value=500k
R67 "RES - 0402" RES_0402 19240,16592.5 r90 top value=1k
R68 "RES - 0402" RES_0402 19470,16172.5 r90 top value=1k
R69 "RES - 0805" RES_0805 19284.5,16170 r0 top value=500k
R70 "RES - 0402" RES_0402 20632,15962.49 r90 top value=499
R71 "RES - 0402" RES_0402 15210,16842.5 r90 top value=499
R72 "RES - 0402" RES_0402 12820,16200 r90 top value=49.9
R73 "RES - 0402" RES_0402 19000,16182.5 r90 top value=49.9
R74 "RES - 0402" RES_0402 20632,15770 r90 top value=499
R75 "RES - 0402" RES_0402 15900,16843.51 r90 top value=44.2
R76 "RES - 0402" RES_0402 15010,16840 r90 top value=499
R77 "RES - 0402" RES_0402 13500,16789.76 r90 top value=25
R78 "RES - 0402" RES_0402 13730,16789.76 r90 top value=25
R79 "RES - 0402" RES_0402 14830,16842.5 r90 top value=1k
R80 "RES - 0402" RES_0402 15365,16515 r90 top value=1k
R81 "RES - 0402" RES_0402 14817.5,16520 r90 top value=499
R82 "RES - 0402" RES_0402 15875,16516.01 r90 top value=44.2
R83 "RES - 0402" RES_0402 14985,16520 r90 top value=499
R84 "RES - 0402" RES_0402 13480,16537.5 r90 top value=25
R85 "RES - 0402" RES_0402 13710,16537.5 r90 top value=25
R86 "RES - 0402" RES_0402 15175,16512.5 r90 top value=1k
R87 "RES - 0402" RES_0402 20625,16840 r90 top value=499
R88 "RES - 0402" RES_0402 20617,16647.64 r90 top value=499
R89 "RES - 0805" RES_0805 19040,15960 r0 top value=500k
R90 "RES - 0402" RES_0402 19222,15952.5 r90 top value=1k
R91 "RES - 0402" RES_0402 13268.31,16200 r90 top value=49.9
R92 "RES - 0402" RES_0402 -2660,16712.5 r90 top value=10k
R93 "RES - 0402" RES_0402 -2668,16536.61 r90 top value=10k
R94 "RES - 0603" RES_0603 -2090,16640 r90 top value=100mOhms
R95 "RES - 0402" RES_0402 -3580,16380 r90 top value=10k
R96 "RES - 0402" RES_0402 -3390,16367.5 r90 top value=10k
R97 "RES - 0603" RES_0603 -2100,16028.5 r90 top value=100mOhms
R98 "RES - 0402" RES_0402 -3520,15870 r90 top value=4.7k
R99 "RES - 0402" RES_0402 -3530,16160 r90 top value=4.7k
R100 "RES - 0402" RES_0402 -7440,14470 r90 top value=750
R101 "RES - 0402" RES_0402 -7160,14470 r90 top value=750
R102 "RES - 0402" RES_0402 -6900,14470 r90 top value=750
R103 "RES - 0402" RES_0402 -6620,14470 r90 top value=750
R104 "RES - 0402" RES_0402 -6990,16270 r90 top value=100k
R105 "RES - 0402" RES_0402 -7168.43,15350 r90 top value=10k
R106 "RES - 0402" RES_0402 -7203.43,16620 r90 top value=10k
R107 "RES - 0603" RES_0603 1790,6798.5 r90 top value=11.1k
R108 "RES - 0402" RES_0402 3950,16552.5 r90 top value=1k
R109 "RES - 0402" RES_0402 5070,16192.5 r90 top value=1k
R110 "RES - 0402" RES_0402 3942,16360 r90 top value=1k
R111 "RES - 0402" RES_0402 3927,16150 r90 top value=1k
R112 "RES - 0402" RES_0402 -6975,16090 r90 top value=100k
R113 "RES - 0402" RES_0402 860,13422.5 r90 top value=1.21k
R114 "RES - 0402" RES_0402 450,16482.5 r90 top value=4.12k
R115 "RES - 0402" RES_0402 690,16477.5 r90 top value=4.75k
R116 "RES - 0402" RES_0402 675.98,15830 r90 top value=4.75k
R117 "RES - 0402" RES_0402 400,14550 r90 top value=3.57k
R118 "RES - 0402" RES_0402 400,14362.5 r90 top value=1.15k
R119 "RES - 0402" RES_0402 820,10652.5 r90 top value=12.1k
R120 "RES - 0402" RES_0402 850,12267.46 r90 top value=174k
R121 "RES - 0402" RES_0402 850,12070 r90 top value=11.5k
R122 "RES - 0402" RES_0402 1060,12032.5 r90 top value=90.9k
R123 "RES - 0402" RES_0402 980,9442.5 r90 top value=10k
R124 "RES - 0402" RES_0402 992,9207.5 r90 top value=53k
R125 "RES - 1206" RES_1206 1370,12020 r90 top value=332k
R126 "RES - 0805" RES_0805 1640,12050 r90 top value=102k
R127 "RES - 0603" RES_0603 845,8047.5 r90 top value=65.7k
R128 "RES - 0402" RES_0402 830,8292.5 r90 top value=10k
R129 "RES - 0402" RES_0402 -6980,15070 r90 top value=10k
R130 "RES - 0402" RES_0402 -7260,15070 r90 top value=10k
R131 "RES - 0402" RES_0402 -6937.5,14725 r90 top value=10k
R132 "RES - 0402" RES_0402 -7210,14740 r90 top value=10k
R133 "RES - 0402" RES_0402 1540,8307.5 r90 top value=25.5k
R134 "RES - 0402" RES_0402 1532,8122.5 r90 top value=10k
R135 "RES - 0402" RES_0402 -30,8292.5 r90 top value=90.9k
R136 "RES - 0402" RES_0402 -30,8080 r90 top value=12.1k
S1 "B3SN-3012P" SWI_TACT_B3SN-3012P -7410,16130 r90 top value=SPST-NO
S2 "B3SN-3012P" SWI_TACT_B3SN-3012P -7380,15490 r90 top value=SPST-NO
S3 "B3SN-3012P" SWI_TACT_B3SN-3012P -7415,16780 r90 top value=SPST-NO
T1 "H1102NLT" TRANSFO_H1102NLT 8950,16440 r0 top value="1:1 (350uH)"
U1 "XC6SLX100-3FGG676C" FPGA_XILINX_FGG676 25250,16640 r0 top
U2 "MT41J128M16JT-125" MEM_DDR3_MT41J128M16JT-125 13090,3160 r0 top
U3 "TPS51200DRCT" REG_PMIC_TPS51200DRCT 7440,3360 r0 top value="DDR, DDR2, DDR3(L), DDR4"
U4 "M25P128-VME6TGB" MICT-VDFPN-8_M -12510,14340 r90 top
U5 "KSZ8091MNXCA" COM_ETH_PHY_KSZ8091MNXCA 7942.13,16602.13 r0 top
U6 "SI8620BB-B-IS" ISO_SI8620BB-B-IS -11820.96,15635 r0 top
U7 "AD9146BCPZ" DAC_AD9146BCPZ 13210,16650 r0 top
U8 "ADS62P48IRGCT" ADC_ADS62P48IRGCT 21710,16520 r0 top
U9 "ADA4927-2YCPZ-R2" OPAMP_ADA4927-2YCPZ-R2 19930,16420 r0 top
U10 "DRV8811PWPR" POW_MOTOR_DRV8811PWPR -3020,16380 r0 top
U11 "AD8056ARMZ" OPAMP_AD8056ARMZ 15700,16740 r90 top
U12 "CDCE62005RGZT" TIM_CDCE62005RGZT 4539.84,16443.82 r0 top
U13 "TPS3808G01DBVR" POW_RESET_TPS3808 -7170,16206.85 r0 top
U14 "NCP59744MN1ADJTBG" REG_LDO_NCP59744MN1ADJTBG 24.13,16650 r0 top value="0.8V ~ 3.6V"
U15 "PTH04T231WAZ" REG_SWR_PTH04T231WAZ 255.98,15540 r90 top value="0.69 - 3.6V (Out)"
U16 "PTH08T241WAZ" REG_SWR_PTH08T241WAZ 310,10770 r90 top
U17 "PTH04T231WAZ" REG_SWR_PTH04T231WAZ 320,13410 r90 top value="0.69 - 3.6V (Out)"
U18 "LMZ34002RKGR" REG_SWR_LMZ34002RKGR 239.92,12158.66 r0 top value="-3 ~ -17V"
U19 "NCP59744MN1ADJTBG" REG_LDO_NCP59744MN1ADJTBG 24.13,14520 r0 top value="0.8V ~ 3.6V"
U20 "TPS7A3301RGWR" REG_LDO_TPS7A3301RGWR 670,12220 r0 top value=-1.18V~-33V
U21 "LMZ23610TZ/NOPB" NDY0011A_M 270,9300 r90 top
U22 "LMZ23603TZE/NOPB" NDW0007A_V 530,8060.24 r90 top
U23 "TC74A0-3.3VCTTR" SEN_TEMP_TC74A0-3.3VCTTR -7400,15040 r0 top
U24 "TC74A0-3.3VCTTR" SEN_TEMP_TC74A0-3.3VCTTR -7390,14740 r0 top
U25 "TPS7A4701RGWR" REG_TPS7A4701RGWR 1281.18,8234.49 r0 top value="1.4 à 34V"
Y1 "ASDMB-25.000MHZ-LC-T" OSC_ASDMB-25.000MHZ-LC-T 7219.5,16612.13 r0 top value=25MHz
Y2 "590BD-BDG" OSC_590BD-BDG 3740,16460 r0 top value="±7ppm (freq Stability), ±20ppm (freq stability total)"

## Footprints (in the part's own frame and the unit in brackets; to place one, negate y for a bottom-side part, rotate by r counter-clockwise, add the part's x,y. Pads: shape width x height; smd on the part's side, far side on the other; paste and mask are expansions set on the pad)
ADC_ADS62P48IRGCT [mm] "QFN, 64-Leads, Body 9,00x9,00mm, Pitch 0,50mm, Thermal Pad 7,40x7,40mm, IPC Medium Density"
  oval 0.8x0.23 smd mask+0.07: 1(-4.475,3.75) 2(-4.475,3.25) 3(-4.475,2.75) 4(-4.475,2.25) 5(-4.475,1.75) 6(-4.475,1.25) 7(-4.475,0.75) 8(-4.475,0.25) 9(-4.475,-0.25) 10(-4.475,-0.75) 11(-4.475,-1.25) 12(-4.475,-1.75) 13(-4.475,-2.25) 14(-4.475,-2.75) 15(-4.475,-3.25) 16(-4.475,-3.75) 33(4.475,-3.75) 34(4.475,-3.25) 35(4.475,-2.75) 36(4.475,-2.25) 37(4.475,-1.75) 38(4.475,-1.25) 39(4.475,-0.75) 40(4.475,-0.25) 41(4.475,0.25) 42(4.475,0.75) 43(4.475,1.25) 44(4.475,1.75) 45(4.475,2.25) 46(4.475,2.75) 47(4.475,3.25) 48(4.475,3.75)
  oval 0.23x0.8 smd mask+0.07: 17(-3.75,-4.475) 18(-3.25,-4.475) 19(-2.75,-4.475) 20(-2.25,-4.475) 21(-1.75,-4.475) 22(-1.25,-4.475) 23(-0.75,-4.475) 24(-0.25,-4.475) 25(0.25,-4.475) 26(0.75,-4.475) 27(1.25,-4.475) 28(1.75,-4.475) 29(2.25,-4.475) 30(2.75,-4.475) 31(3.25,-4.475) 32(3.75,-4.475) 49(3.75,4.475) 50(3.25,4.475) 51(2.75,4.475) 52(2.25,4.475) 53(1.75,4.475) 54(1.25,4.475) 55(0.75,4.475) 56(0.25,4.475) 57(-0.25,4.475) 58(-0.75,4.475) 59(-1.25,4.475) 60(-1.75,4.475) 61(-2.25,4.475) 62(-2.75,4.475) 63(-3.25,4.475) 64(-3.75,4.475)
  rect 7.4x7.4 smd mask+0.07: PAD(0,0)
  silkscreen extent -5.5,-4.72 4.72,4.72, body extent -4.57,-4.57 4.57,4.57, height 1
CAP_0402 [mil]
  rrect60% 20x20 smd: 1(-17.5,0) 2(17.5,0)
  silkscreen extent -32,-15 32,15, body extent -19,-10 20,10, height 20
CAP_0603 [mil]
  rrect35% 35x34 smd: 1(-29.5,0) 2(29.5,0)
  silkscreen extent -56,-30 56,30, body extent -32,-16 31,16, height 35
CAP_0805 [mil]
  rrect37% 43x55 smd: 1(-33.5,0) 2(33.5,0)
  silkscreen extent -66,-38 66,38, body extent -39,-24 40,25, height 49
CAP_1206 [mil]
  rrect34% 47x71 smd: 1(-57,0) 2(57,0)
  silkscreen extent -91,-45 91,45, body extent -62,-31 64,32, height 49
COM_ETH_PHY_KSZ8091MNXCA [mm]
  rect 0.8x0.25 smd: 1(-2.45,1.75) 2(-2.45,1.25) 3(-2.45,0.75) 4(-2.45,0.25) 5(-2.45,-0.25) 6(-2.45,-0.75) 7(-2.45,-1.25) 8(-2.45,-1.75) 17(2.45,-1.75) 18(2.45,-1.25) 19(2.45,-0.75) 20(2.45,-0.25) 21(2.45,0.25) 22(2.45,0.75) 23(2.45,1.25) 24(2.45,1.75)
  rect 0.25x0.8 smd: 9(-1.75,-2.45) 10(-1.25,-2.45) 11(-0.75,-2.45) 12(-0.25,-2.45) 13(0.25,-2.45) 14(0.75,-2.45) 15(1.25,-2.45) 16(1.75,-2.45) 25(1.75,2.45) 26(1.25,2.45) 27(0.75,2.45) 28(0.25,2.45) 29(-0.25,2.45) 30(-0.75,2.45) 31(-1.25,2.45) 32(-1.75,2.45)
  rrect0% 3.4x3.4 smd: 33(0,0)
  round 0.6 hole 0.35: 34(-1.07,1.07) 35(0,1.07) 36(1.07,1.07) 37(-1.07,0) 38(0,0) 39(1.07,0) 40(-1.07,-1.07) 41(0,-1.07) 42(1.07,-1.07)
  silkscreen extent -3.48,-2.98 2.98,2.98, body extent -2.5,-2.5 2.5,2.5, height 0.9
CON_MINIFIT_0039300060 [mm]
  round 0 hole 2.997 unplated mask+0.07: 0(-4.2,2.718) 0(4.2,2.718)
  rect 3x3 hole 1.803 mask+0.07: 1(-4.2,-4.583)
  round 3 hole 1.803 mask+0.07: 2(0,-4.583) 3(4.2,-4.583) 4(-4.2,-10.082) 5(0,-10.082) 6(4.2,-10.082)
  silkscreen extent -7.37,-3.3 6.98,9.4, body extent -7.3,-10.62 6.9,9.32, height 11.4
CON_USB_10118194-0001LF [mm]
  rrect50% 0.4x1.35 smd paste+0 mask+0.05: 1(-1.3,2.7) 2(-0.65,2.7) 3(0,2.7) 4(0.65,2.7) 5(1.3,2.7)
  rrect100% 1.25x0.95 hole 0.55 slot 0.85 at 0 deg mask+0.05: 6(2.5,2.7) 11(-2.5,2.7)
  rrect100% 0.95x1.55 hole 0.5 slot 1.15 at 90 deg mask+0.05: 7(3.5,0) 10(-3.5,0)
  rect 1.5x1.55 smd paste+0 mask+0.05: 8(1,0) 9(-1,0)
  Top region: 2.3,-0.775 3.5,-0.775 3.5,0.775 2.3,0.775
  Top region: -2.3,0.775 -3.5,0.775 -3.5,-0.775 -2.3,-0.775
  silkscreen extent -4.3,-1.2 4.3,4.11, body extent -4.03,-2.69 4.02,2.89, height 2.72
CONN_ETHERNET_RJHSE-5385 [mil] "Ethernet connector with LEDs"
  round 150 hole 128: 0(-250,-100) 0(250,-100)
  oct 60x60 hole 35: 1(140,0)
  round 60 hole 35: 2(100,70) 3(60,0) 4(20,70) 5(-20,0) 6(-60,70) 7(-100,0) 8(-140,70) 9(270,260) 10(180,260) 11(-180,260) 12(-270,260)
  silkscreen extent -330,-300 335,300, body extent -329,-325 334,313, height 597
CONN_SMA_5-1814832-1 [mm] "SMA Straight Jack, 6.35x6.35x9.5mm"
  round 2.2 hole 1.65: 1(0,0) 2(-2.54,2.54) 3(2.54,2.54) 4(-2.54,-2.54) 5(2.54,-2.54)
  silkscreen extent -3.17,-3.18 3.18,3.17, body extent -3.17,-3.17 3.18,3.18, height 9.5
CONN_TERMINAL_OSTTA040161 [mm] "4-pins terminal block"
  rect 1.905x1.905 hole 1.3 mask+0.12: 1(-7.5,0)
  round 1.905 hole 1.3 mask+0.12: 2(-2.5,0) 3(2.5,0) 4(7.5,0)
  silkscreen extent -10.6,-4 10.6,5, body extent -10.67,-3.3 10.49,4.2, height 10.08
DAC_AD9146BCPZ [mm] "QFN, 48-Leads, Body 7x7mm, Pitch 0.5mm, Thermal Pad 5.6x5.6mm, IPC Medium Density"
  oval 0.85x0.28 smd mask+0.07: 1(-3.475,2.75) 2(-3.475,2.25) 3(-3.475,1.75) 4(-3.475,1.25) 5(-3.475,0.75) 6(-3.475,0.25) 7(-3.475,-0.25) 8(-3.475,-0.75) 9(-3.475,-1.25) 10(-3.475,-1.75) 11(-3.475,-2.25) 12(-3.475,-2.75) 25(3.475,-2.75) 26(3.475,-2.25) 27(3.475,-1.75) 28(3.475,-1.25) 29(3.475,-0.75) 30(3.475,-0.25) 31(3.475,0.25) 32(3.475,0.75) 33(3.475,1.25) 34(3.475,1.75) 35(3.475,2.25) 36(3.475,2.75)
  oval 0.28x0.85 smd mask+0.07: 13(-2.75,-3.475) 14(-2.25,-3.475) 15(-1.75,-3.475) 16(-1.25,-3.475) 17(-0.75,-3.475) 18(-0.25,-3.475) 19(0.25,-3.475) 20(0.75,-3.475) 21(1.25,-3.475) 22(1.75,-3.475) 23(2.25,-3.475) 24(2.75,-3.475) 37(2.75,3.475) 38(2.25,3.475) 39(1.75,3.475) 40(1.25,3.475) 41(0.75,3.475) 42(0.25,3.475) 43(-0.25,3.475) 44(-0.75,3.475) 45(-1.25,3.475) 46(-1.75,3.475) 47(-2.25,3.475) 48(-2.75,3.475)
  rect 5.6x5.6 smd mask+0.07: PAD(0,0)
  silkscreen extent -4.47,-3.7 3.7,3.7, body extent -3.55,-3.55 3.55,3.55, height 0.8
DIO_SCHOTTKY_MBRB4030T4G [mil]
  rrect50% 40x137.95 smd paste+0 mask+4: 1(-100,-333.68) 3(100,-333.68)
  rrect5% 412.99x329.92 smd paste-206.5 mask+4: 4(0,68.41)
  silkscreen extent -225,-340 225,250, body extent -199,-372 201,229, height 196
FER_0402 [mil]
  rrect60% 20x20 smd: 1(-17.5,0) 2(17.5,0)
  silkscreen extent -32,-15 32,15, body extent -20,-10 20,10, height 20
FID_CIRCLE_1MM [mm]
  round 1 smd paste-1 mask+1: 1(0,0)
  round 1 smd far side paste-1 mask+1: 2(0,0)
  Top keep-out circle w1: c0,0 r1
  Bottom keep-out circle w1: c0,0 r1
  silkscreen extent -1.65,-1.65 1.65,1.65
FP-LQH5BPB_T0-MFG [mm]
  rect 1.85x4.1 smd paste+0 mask+0: 1(-1.825,0) 2(1.825,0)
  silkscreen extent -2.6,-2.6 2.6,2.6, body extent -2.85,-2.7 2.85,2.7, height 0.25